# Altium PCB main PCB .PcbDoc
Units mm, origin at the board's own origin, x right, y up, seen from the top; angles counter-clockwise.
Board outline 150 x 150 mm, 2 copper layers (Top Layer, Bottom Layer); 8 components, 0 nets, 72 pads, 0 vias.
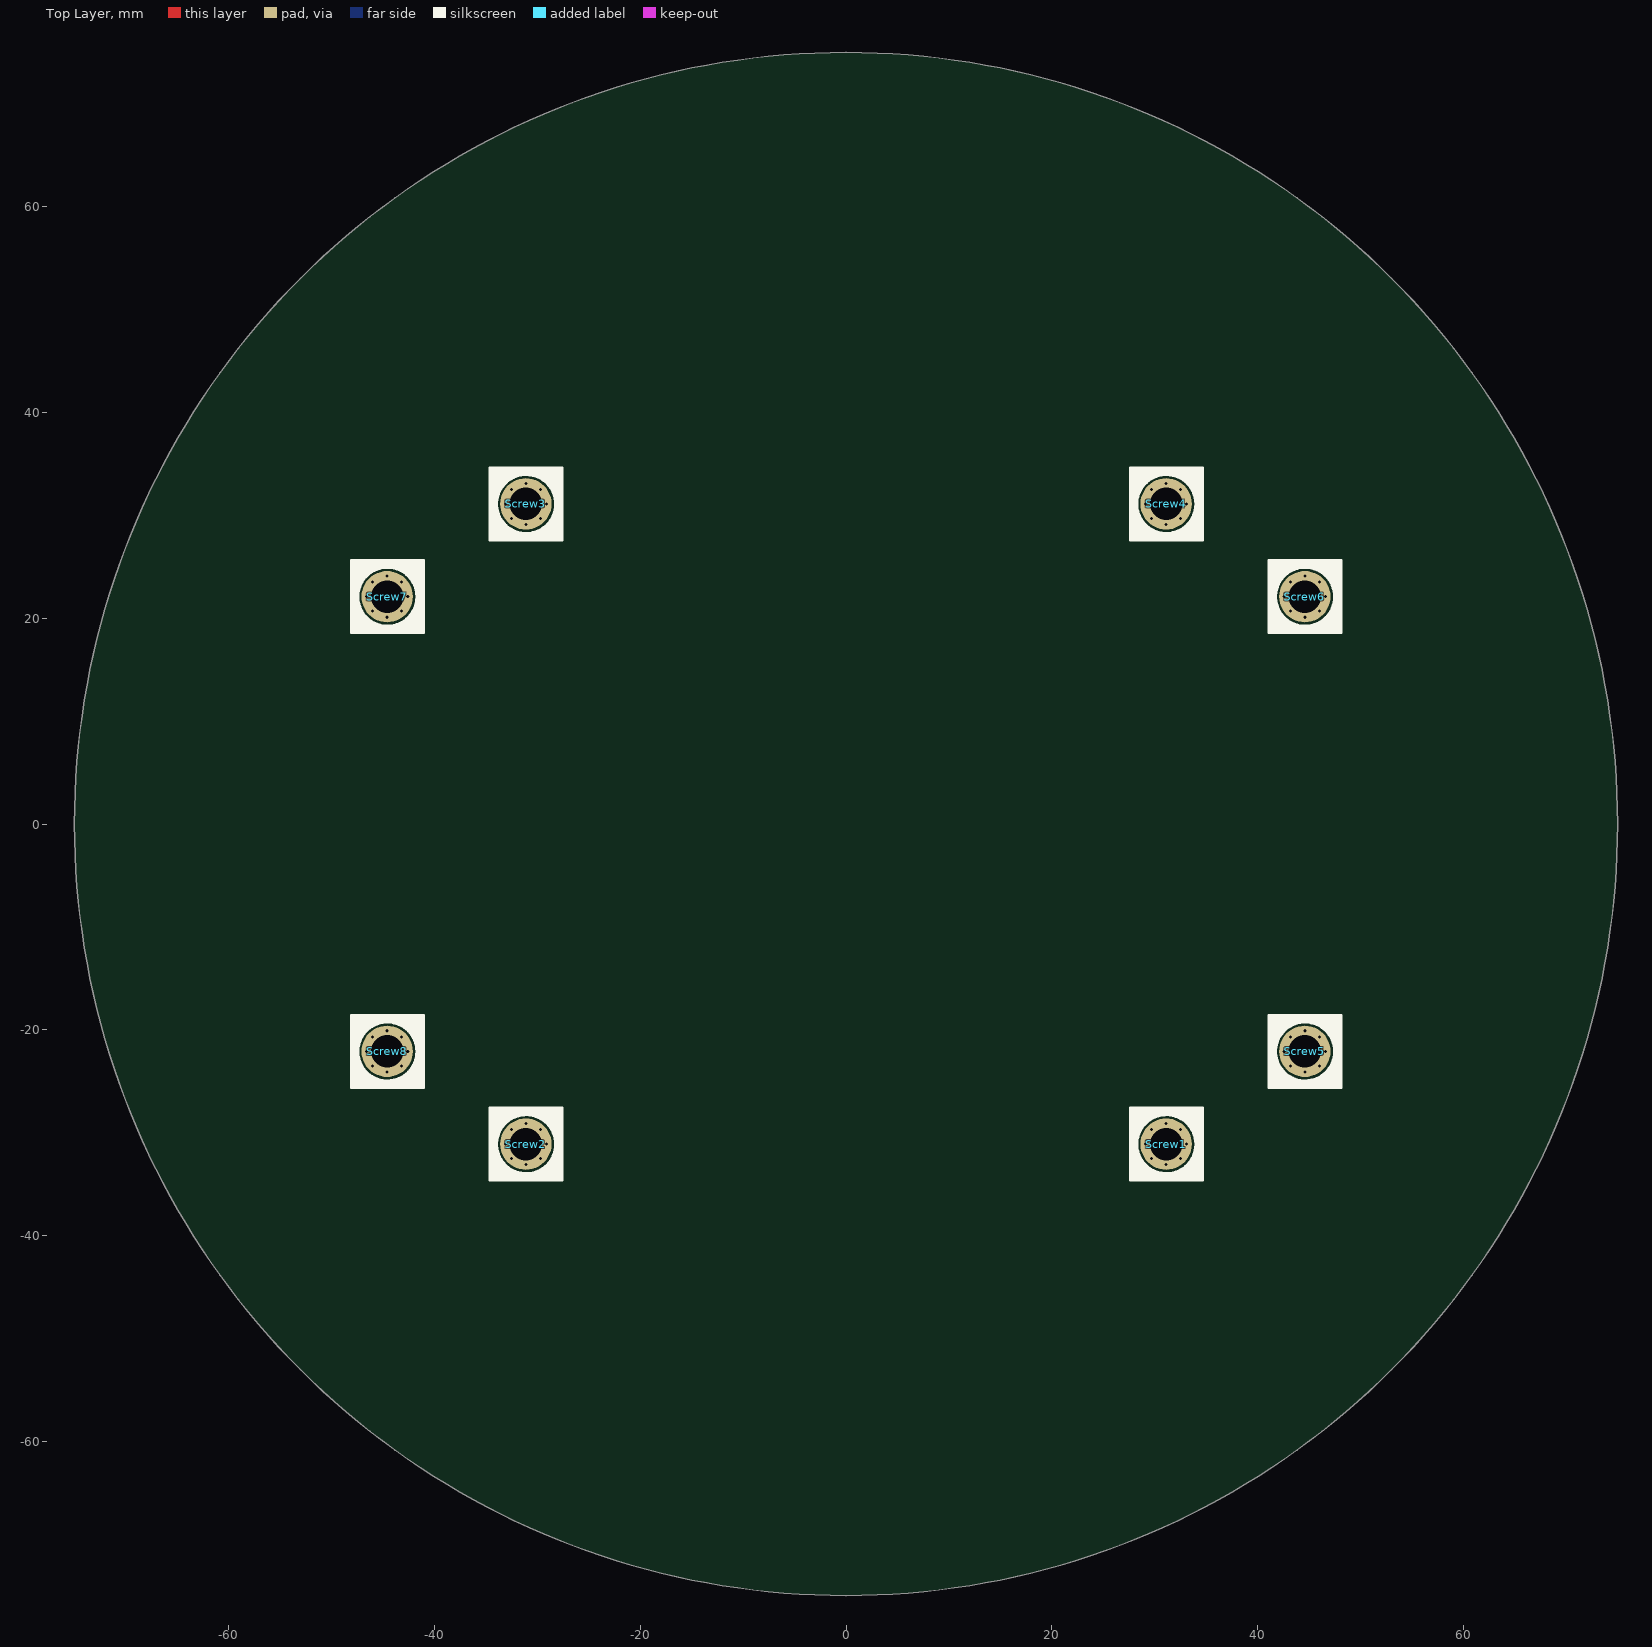
[diagram p0: Top Layer view]
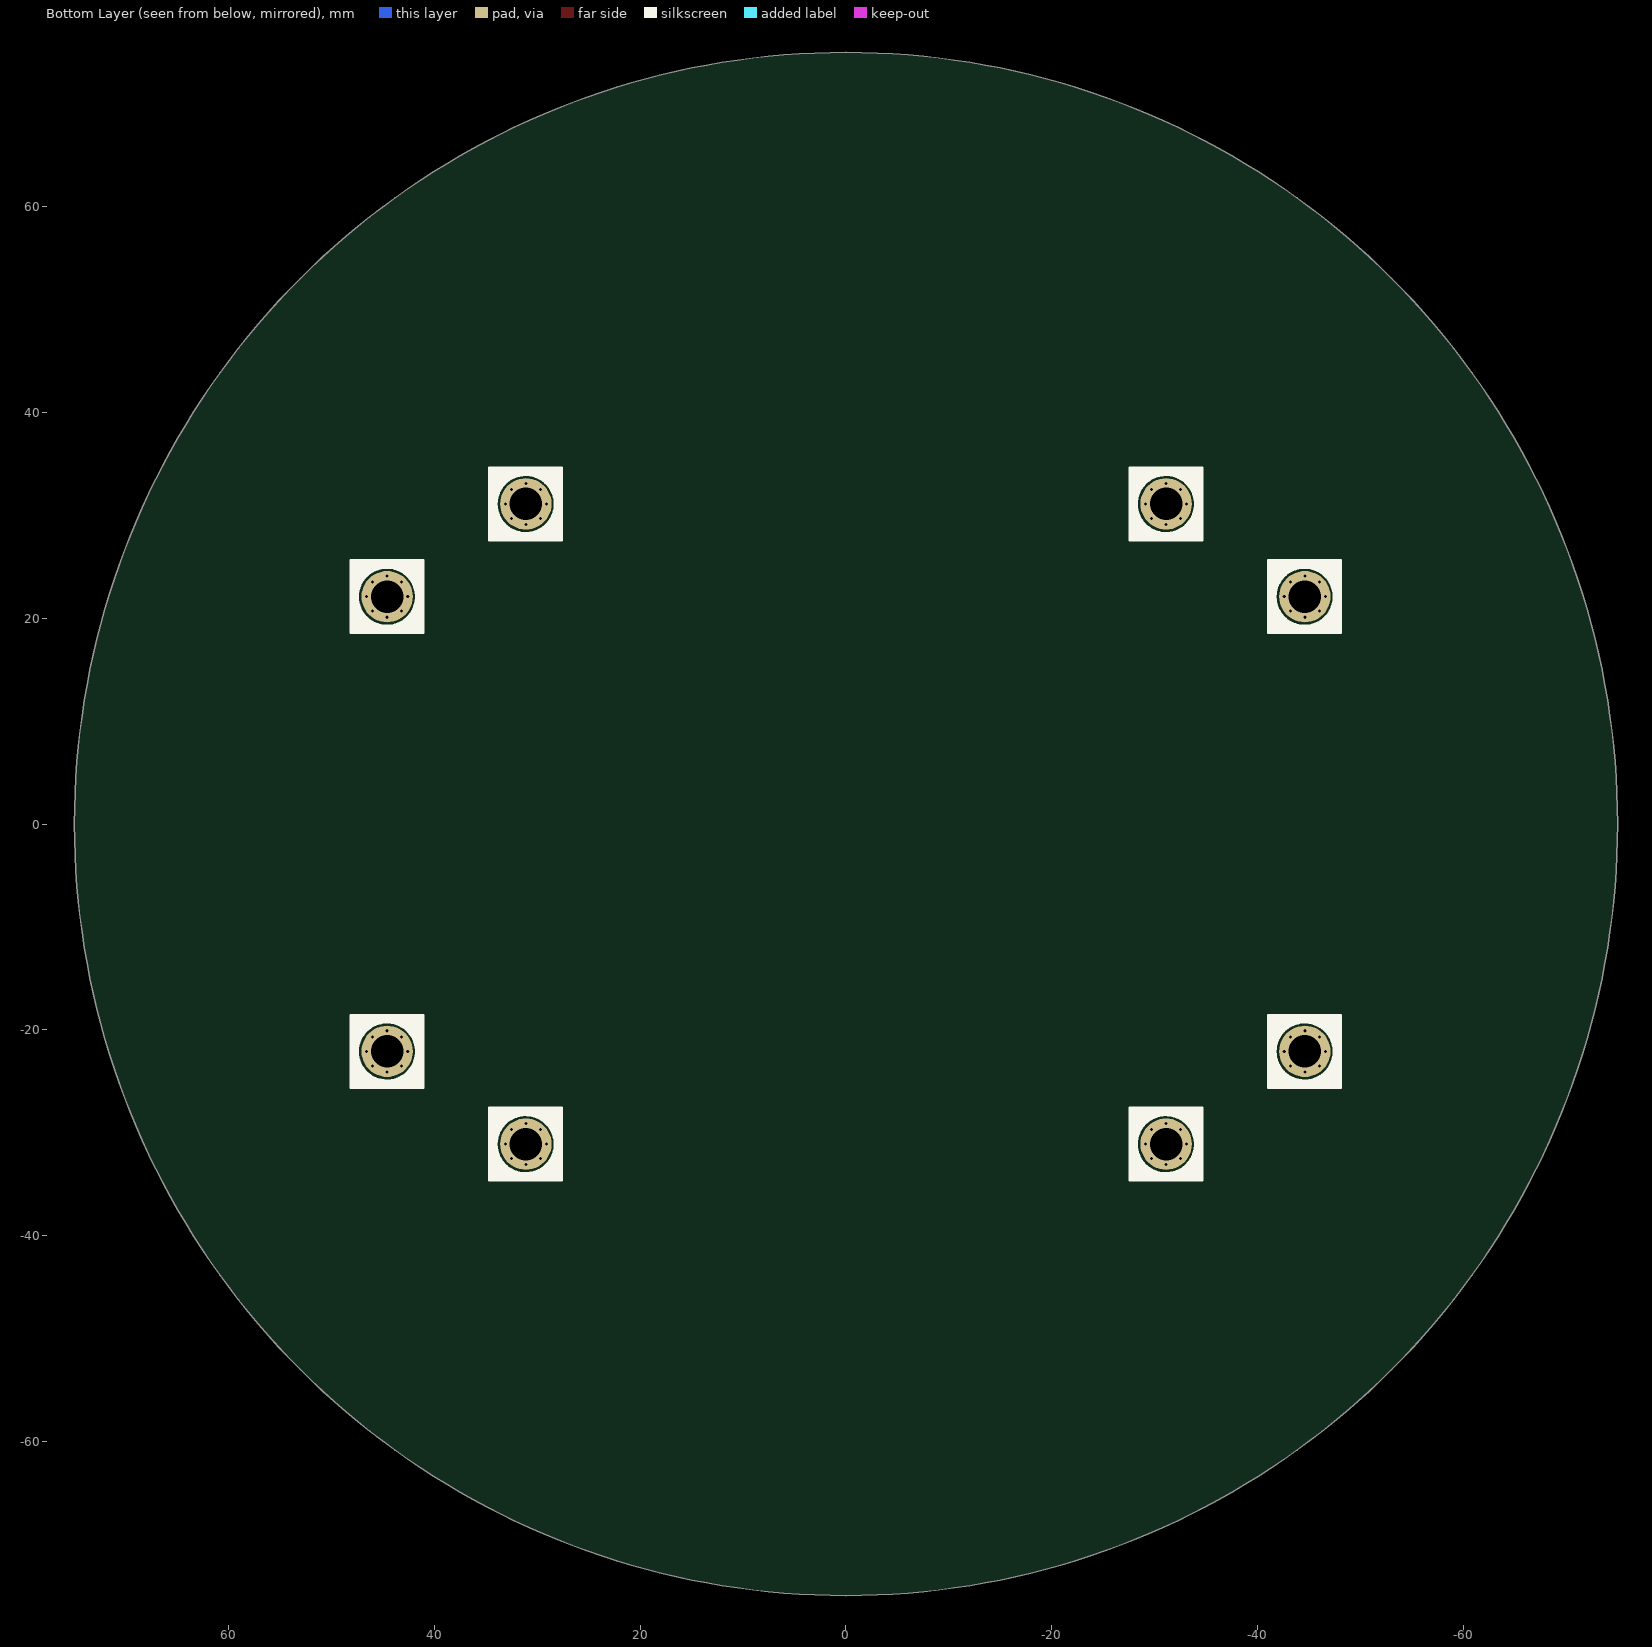
[diagram p1: Bottom Layer view, seen from below]

## Layer stack, top to bottom
Top Solder: solder mask 0.0102, Solder Resist, Dk 3.5
Top Layer: signal copper 0.0356
Dielectric 1: dielectric 0.32, FR-4, Dk 4.8
Bottom Layer: signal copper 0.0356
Bottom Solder: solder mask 0.0102, Solder Resist, Dk 3.5

## Board outline
-75.004,0.004 ccw(c-0.004,0.004) -0.004,-74.996 ccw(c-0.004,0.004) 74.996,0.004 ccw(c-0.004,0.004) -0.004,75.004 ccw(c-0.004,0.004)

## Design rules (kind name [scope] priority, off if disabled: settings)
Clearance [InNetClass('FTDI')] p1: gap=0.3 ignorepadtopadclearanceinfootprint=TRUE
Clearance Clearance_1 [All] p2: gap=0.5 ignorepadtopadclearanceinfootprint=TRUE
PolygonConnect [All] p1: connectstyle=Relief reliefconductorwidth=0.254 reliefentries=4 polygonreliefangle="90 Angle" airgapwidth=0.254
RoutingVias [All] p1: holewidth=0.711 width=1.27 viastyle="Through Hole" minholewidth=0.5 minwidth=1 maxholewidth=0.711 maxwidth=1.27
SolderMaskExpansion [All] p1: expansion=0.102
Width NetFT [InNetClass('ftdi')] p1: maxlimit=3 minlimit=0.254 preferedwidth=0.3 minimp=50.000000 maximp=50.000000 favimp=50.000000
Width [All] p2: maxlimit=3 minlimit=0.3 preferedwidth=1 minimp=50.000000 maximp=50.000000 favimp=50.000000
30 further rules are at their usual default settings.

## Components (designator, comment, footprint, x,y, rotation, side; value= is the part's Value field where it differs from the comment)
Screw1 "Screw" Screw 31.109,-31.109 r0 top locked
Screw2 "Screw" Screw -31.116,-31.109 r0 top locked
Screw3 "Screw" Screw -31.116,31.116 r0 top locked
Screw4 "Screw" Screw 31.109,31.116 r0 top locked
Screw5 "Screw" Screw 44.596,-22.096 r0 top locked
Screw6 "Screw" Screw 44.596,22.103 r0 top locked
Screw7 "Screw" Screw -44.604,22.103 r0 top locked
Screw8 "Screw" Screw -44.604,-22.096 r0 top locked

## Footprints (in the part's own frame and the unit in brackets; to place one, negate y for a bottom-side part, rotate by r counter-clockwise, add the part's x,y. Pads: shape width x height; smd on the part's side, far side on the other; paste and mask are expansions set on the pad)
Screw [mm]
  round 0.6 hole 0.3: S(-2,0) S(-1.414,-1.414) S(-1.414,1.414) S(0,-2) S(0,2) S(1.414,-1.414) S(1.414,1.414) S(2,0)
  round 5 hole 3.15 mask+0.1: S(0,0)
  silkscreen extent -3.49,-3.53 3.56,3.52, body extent -2.8,-2.8 2.8,2.8, height 3.88

## Part data
Screw1 Screw2 Screw3 Screw4 Screw5 Screw6 Screw7 Screw8: LatestRevisionDate=17-Jul-2002, LatestRevisionNote="Re-released for DXP Platform.", Publisher="Altium Limited"

## Nets (pads, with @x,y where several pads share a name; then routed paths per layer and width w, separated by ;. In a path a pad name is that pad's centre, name@x,y a point inside that pad or via, vN(x,y) a via of type N, cw(c..) or ccw(c..) an arc to the next point about the centre after c; other vN are vias at no path point)
pads on no net: Screw1.S Screw2.S Screw3.S Screw4.S Screw5.S Screw6.S Screw7.S Screw8.S

## Silkscreen, mask and mechanical layers (free items; w line width, h text height)
Mechanical 1:
  circle w0.013: c-31.116,-31.109 r1.5
  circle w0.013: c31.109,31.116 r1.5
  circle w0.013: c31.109,-31.109 r1.5
  circle w0.013: c-31.116,31.116 r1.5
  circle w0.013: c44.596,22.104 r1.5
  circle w0.013: c44.596,-22.096 r1.5
  circle w0.013: c-44.604,-22.096 r1.5
  circle w0.013: c-44.604,22.104 r1.5
  circle w0.013: c-0.004,0.004 r75